# Altium PCB PCB1.PcbDoc
Units mil, origin at the board's own origin, x right, y up, seen from the top; angles counter-clockwise.
Board outline 1530 x 3995 mil, 2 copper layers (Top Layer, Bottom Layer); 5 components, 13 nets, 69 pads, 0 vias.
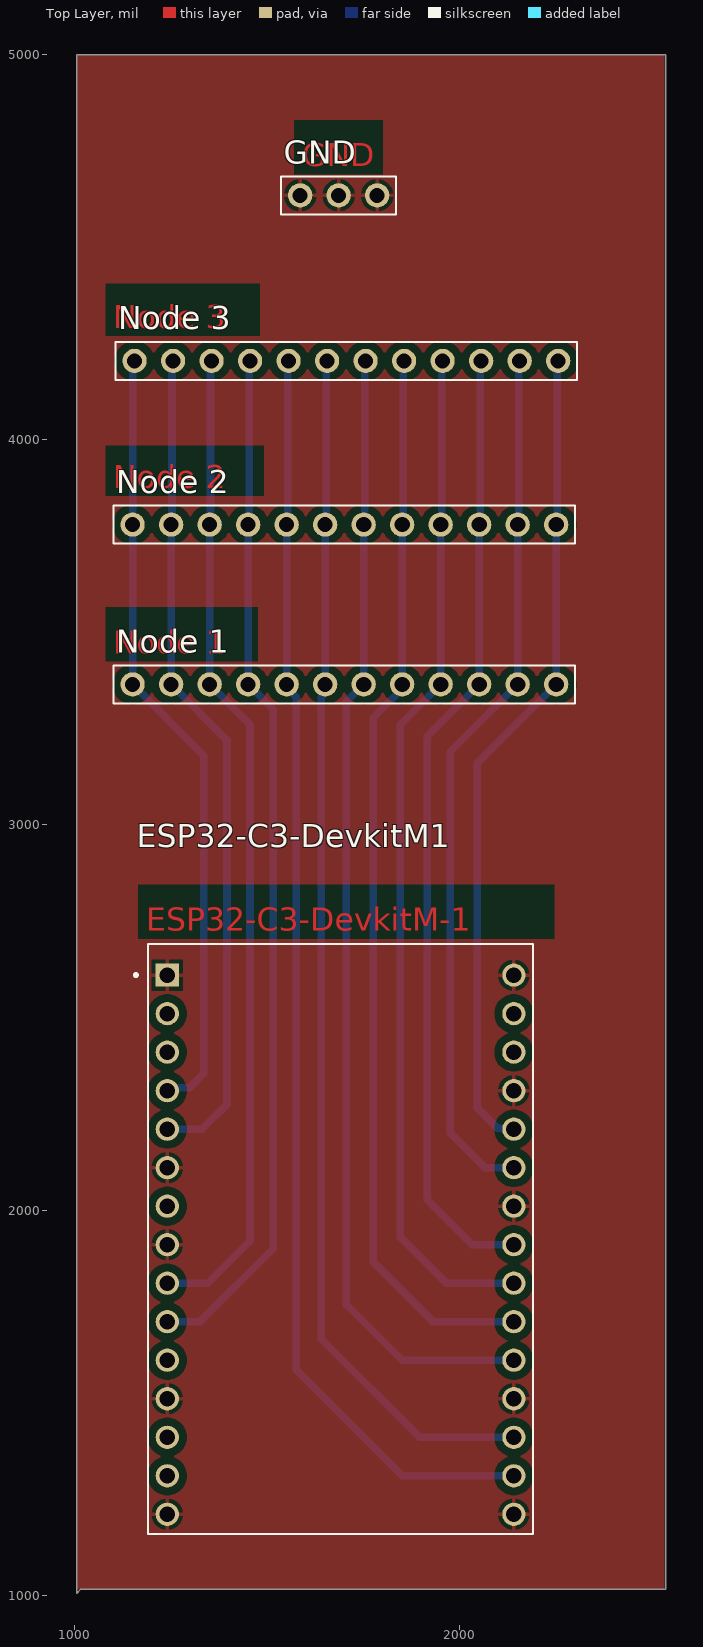
[diagram p0: Top Layer view]
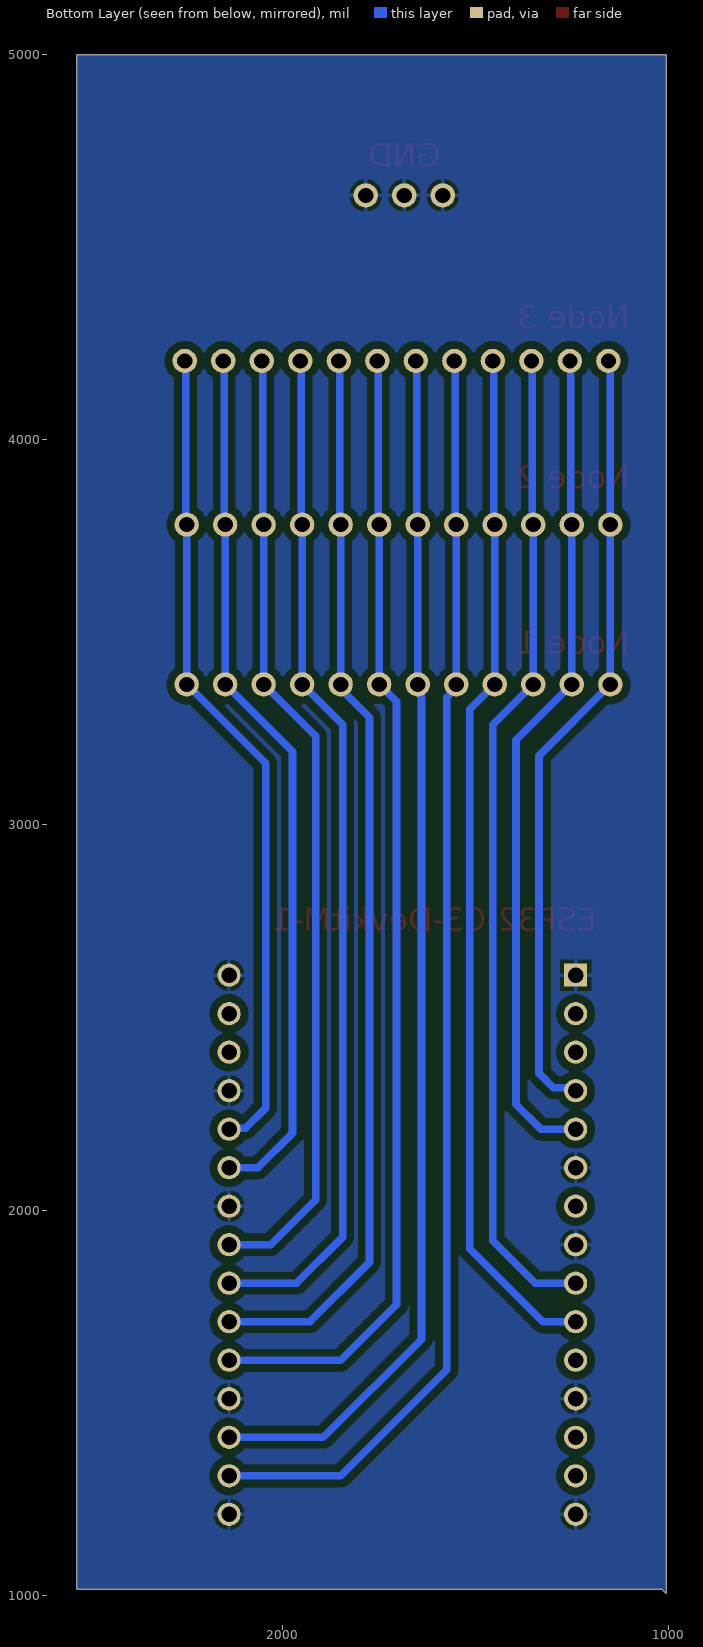
[diagram p1: Bottom Layer view, seen from below]
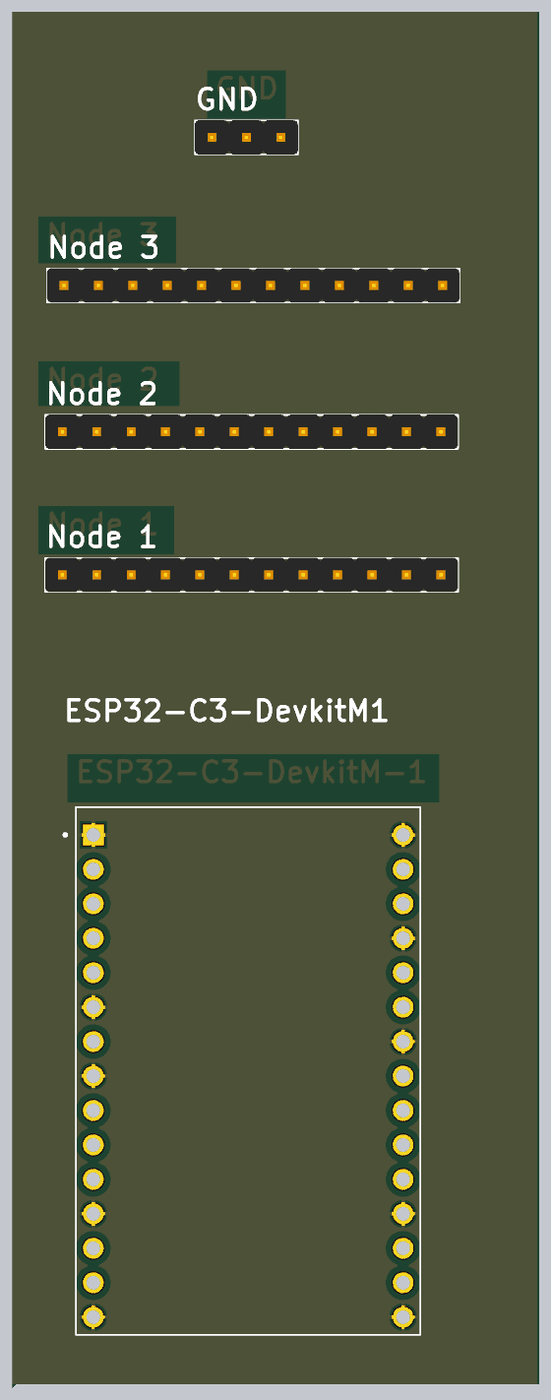
[diagram p2: 3D render of the assembled board from above, using the file's embedded part models]

## Layer stack, top to bottom
Top Solder: solder mask 0.4, Solder Resist, Dk 3.5
Top Layer: signal copper 1.4
Dielectric 1: dielectric 12.6, FR-4, Dk 4.8
Bottom Layer: signal copper 1.4
Bottom Solder: solder mask 0.4, Solder Resist, Dk 3.5

## Board outline
1005,5000 2535,5000 2535,1015 1015,1015 1005,1005

## Design rules (kind name [scope] priority, off if disabled: settings)
Clearance [All] p1: gap=20 ignorepadtopadclearanceinfootprint=FALSE
PolygonConnect [All] p1: connectstyle=Relief reliefconductorwidth=10 reliefentries=4 polygonreliefangle="90 Angle" airgapwidth=10
RoutingVias [All] p1: holewidth=28 width=50 viastyle="Through Hole" minholewidth=28 minwidth=50 maxholewidth=28 maxwidth=50
SolderMaskExpansion [All] p1: expansion=4 istentingtop=FALSE
Width [All] p1: maxlimit=20 minlimit=20 preferedwidth=20
30 further rules are at their usual default settings.

## Components (designator, comment, footprint, x,y, rotation, side; value= is the part's Value field where it differs from the comment)
ESP32-C3-DevkitM1 "ESP32-C3-DEVKITM-1" XCVR_ESP32-C3-DEVKITM-1 1690,1925.16 r0 top
GND "Header 1x3" "Header 1x3" 1785,4635 r180 top
"Node 1" "Header 1x12" "Header 1x12" 2250,3365 r180 top
"Node 2" "Header 1x12" "Header 1x12" 2250,3780 r180 top
"Node 3" "Header 1x12" "Header 1x12" 2255,4205 r180 top

## Footprints (in the part's own frame and the unit in brackets; to place one, negate y for a bottom-side part, rotate by r counter-clockwise, add the part's x,y. Pads: shape width x height; smd on the part's side, far side on the other; paste and mask are expansions set on the pad)
"Header 1x3" [mm]
  round 1.6 hole 1: 1(0,0) 2(2.54,0) 3(5.08,0)
  silkscreen extent -1.25,-1.25 6.33,1.25, body extent -1.26,-1.28 6.36,1.26, height 8.89
"Header 1x12" [mm]
  round 1.6 hole 1: 1(0,0) 2(2.54,0) 3(5.08,0) 4(7.62,0) 5(10.16,0) 6(12.7,0) 7(15.24,0) 8(17.78,0) 9(20.32,0) 10(22.86,0) 11(25.4,0) 12(27.94,0)
  silkscreen extent -1.25,-1.25 29.19,1.25, body extent -1.26,-1.28 29.22,1.26, height 8.89
XCVR_ESP32-C3-DEVKITM-1 [mm]
  rect 1.53x1.53 hole 1.02: 1(-11.43,17.395)
  round 1.53 hole 1.02: 2(-11.43,14.855) 3(-11.43,12.315) 4(-11.43,9.775) 5(-11.43,7.235) 6(-11.43,4.695) 7(-11.43,2.155) 8(-11.43,-0.385) 9(-11.43,-2.925) 10(-11.43,-5.465) 11(-11.43,-8.005) 12(-11.43,-10.545) 13(-11.43,-13.085) 14(-11.43,-15.625) 15(-11.43,-18.165) 16(11.43,-18.165) 17(11.43,-15.625) 18(11.43,-13.085) 19(11.43,-10.545) 20(11.43,-8.005) 21(11.43,-5.465) 22(11.43,-2.925) 23(11.43,-0.385) 24(11.43,2.155) 25(11.43,4.695) 26(11.43,7.235) 27(11.43,9.775) 28(11.43,12.315) 29(11.43,14.855) 30(11.43,17.395)
  silkscreen extent -13.6,-19.46 12.7,19.46

## Part data
ESP32-C3-DevkitM1: "WiFi Development Tools (802.11) (ENGINEERING SAMPLE ONLY) ESP32-C3 General-Purpose Dev Board, Embeds ESP32-C3-MINI-1, 4 MB Flash, w/ Pin Header", Package=None, Availability="In Stock", Check_prices=https://www.snapeda.com/parts/ESP32-C3-DEVKITM-1/Espressif+Systems/view-part/?ref=eda, MF="Espressif Systems", MP=ESP32-C3-DEVKITM-1, Price=None, Purchase-URL=https://pricing.snapeda.com/search/part/ESP32-C3-DEVKITM-1/?ref=eda, SnapEDA_Link=https://www.snapeda.com/parts/ESP32-C3-DEVKITM-1/Espressif+Systems/view-part/?ref=snap

## Nets (pads, with @x,y where several pads share a name; then routed paths per layer and width w, separated by ;. In a path a pad name is that pad's centre, name@x,y a point inside that pad or via, vN(x,y) a via of type N, cw(c..) or ccw(c..) an arc to the next point about the centre after c; other vN are vias at no path point)
A0: "Node 1.9" "Node 2.9" "Node 3.9" ESP32-C3-DevkitM1.10 | length 2687.7
  Bottom Layer w20: ESP32-C3-DevkitM1.10 1325,1710 1515,1900 1515,3300 1450,3365 1450,3780 1452.5,3782.5 1452.5,4202.5 1455,4205
A1: "Node 1.10" "Node 2.10" "Node 3.10" ESP32-C3-DevkitM1.9 | length 2591.1
  Bottom Layer w20: ESP32-C3-DevkitM1.9 1345,1810 1455,1920 1455,3260 1350,3365 1350,3780 1352.5,3782.5 1352.5,4202.5 1355,4205
CLK: "Node 1.12" "Node 2.12" "Node 3.12" ESP32-C3-DevkitM1.4 | length 2042.3
  Bottom Layer w20: 1155,4205 1150,4200 1150,3780 1150,3365 1335,3180 1335,2355 1297.7,2317.7 1247.7,2317.7 ESP32-C3-DevkitM1.4
D0: "Node 1.1" "Node 2.1" "Node 3.1" ESP32-C3-DevkitM1.26 | length 2144.8
  Bottom Layer w20: ESP32-C3-DevkitM1.26 2137.49,2212.51 2097.49,2212.51 2045,2265 2045,3160 2250,3365 2250,3780 2252.5,3782.5 2252.5,4202.5 2255,4205
D1: "Node 1.2" "Node 2.2" "Node 3.2" ESP32-C3-DevkitM1.25 | length 2281.8
  Bottom Layer w20: ESP32-C3-DevkitM1.25 2065,2110 1975,2200 1975,3190 2150,3365 2150,3780 2152.5,3782.5 2152.5,4202.5 2155,4205
D2: "Node 1.3" "Node 2.3" "Node 3.3" ESP32-C3-DevkitM1.23 | length 2509.3
  Bottom Layer w20: 2055,4205 2052.5,4202.5 2052.5,3782.5 2050,3780 2050,3365 1915,3230 1915,2027.18 2032.18,1910 ESP32-C3-DevkitM1.23
D3: "Node 1.4" "Node 2.4" "Node 3.4" ESP32-C3-DevkitM1.22 | length 2665.3
  Bottom Layer w20: 1955,4205 1952.5,4202.5 1952.5,3782.5 1950,3780 1950,3365 1845,3260 1845,1930 1965,1810 ESP32-C3-DevkitM1.22
D4: "Node 1.5" "Node 2.5" "Node 3.5" ESP32-C3-DevkitM1.21 | length 2802.3
  Bottom Layer w20: 1855,4205 1852.5,4202.5 1852.5,3782.5 1850,3780 1850,3353.37 1775,3278.37 1775,1865 1930,1710 ESP32-C3-DevkitM1.21
D5: "Node 1.6" "Node 2.6" "Node 3.6" ESP32-C3-DevkitM1.20 | length 2969
  Bottom Layer w20: 1750,3361.79 1750,3780 1752.5,3782.5 1752.5,4202.5 1755,4205 ; 1750,3365 1705,3320 1705,1755 1850,1610 ESP32-C3-DevkitM1.20
D6: "Node 1.7" "Node 2.7" "Node 3.7" ESP32-C3-DevkitM1.18 | length 3151.8
  Bottom Layer w20: 1655,4205 1652.5,4202.5 1652.5,3782.5 1650,3780 1650,3353.37 1641.77,3345.14 1641.77,3333.56 1640,3331.79 1640,1665 1895,1410 ESP32-C3-DevkitM1.18
D7: "Node 1.8" "Node 2.8" "Node 3.8" ESP32-C3-DevkitM1.17 | length 3311.3
  Bottom Layer w20: 1555,4205 1552.5,4202.5 1552.5,3782.5 1550,3780 1550,3356.79 1575,3331.79 1575,1585 1850,1310 ESP32-C3-DevkitM1.17
GND: ESP32-C3-DevkitM1.1 ESP32-C3-DevkitM1.6 ESP32-C3-DevkitM1.8 ESP32-C3-DevkitM1.12 ESP32-C3-DevkitM1.15 ESP32-C3-DevkitM1.16 ESP32-C3-DevkitM1.19 ESP32-C3-DevkitM1.24 ESP32-C3-DevkitM1.27 ESP32-C3-DevkitM1.30 GND.1 GND.2 GND.3
R_NW: "Node 1.11" "Node 2.11" "Node 3.11" ESP32-C3-DevkitM1.5 | length 2174.1
  Bottom Layer w20: ESP32-C3-DevkitM1.5 1330,2210 1395,2275 1395,3220 1250,3365 1250,3780 1252.5,3782.5 1252.5,4202.5 1255,4205
pads on no net: ESP32-C3-DevkitM1.2 ESP32-C3-DevkitM1.3 ESP32-C3-DevkitM1.7 ESP32-C3-DevkitM1.11 ESP32-C3-DevkitM1.13 ESP32-C3-DevkitM1.14 ESP32-C3-DevkitM1.28 ESP32-C3-DevkitM1.29

## Polygon pours and split planes (outlines as drawn)
GND on Bottom Layer "GND_L02_P000" (solid, pour order 0): 1005,5000 2535,5000 2535,1020 2540,1015 1005,1015
GND on Top Layer "GND_L01_P001" (solid, pour order 1): 1005,5000 2530,5000 2530,1020 2535,1015 1005,1015

## Other copper
Top Layer:
  text "GND" at 1590,4710 h60
  text "Node 3" at 1100,4290 h60
  text "Node 2" at 1100,3875 h60
  text "Node 1" at 1100,3445 h60
  text "ESP32-C3-DevkitM-1" at 1185,2725 h60